# Altium PCB PCB1.PcbDoc
Units mil, origin at the board's own origin, x right, y up, seen from the top; angles counter-clockwise.
Board outline 2560.01 x 1600.01 mil, 4 copper layers (SIG1, GND2, Power3, SIG4), stack 61.58 mil thick; 55 components, 43 nets, 181 pads, 44 vias.
Unrouted connection lines stored in the file: 45.
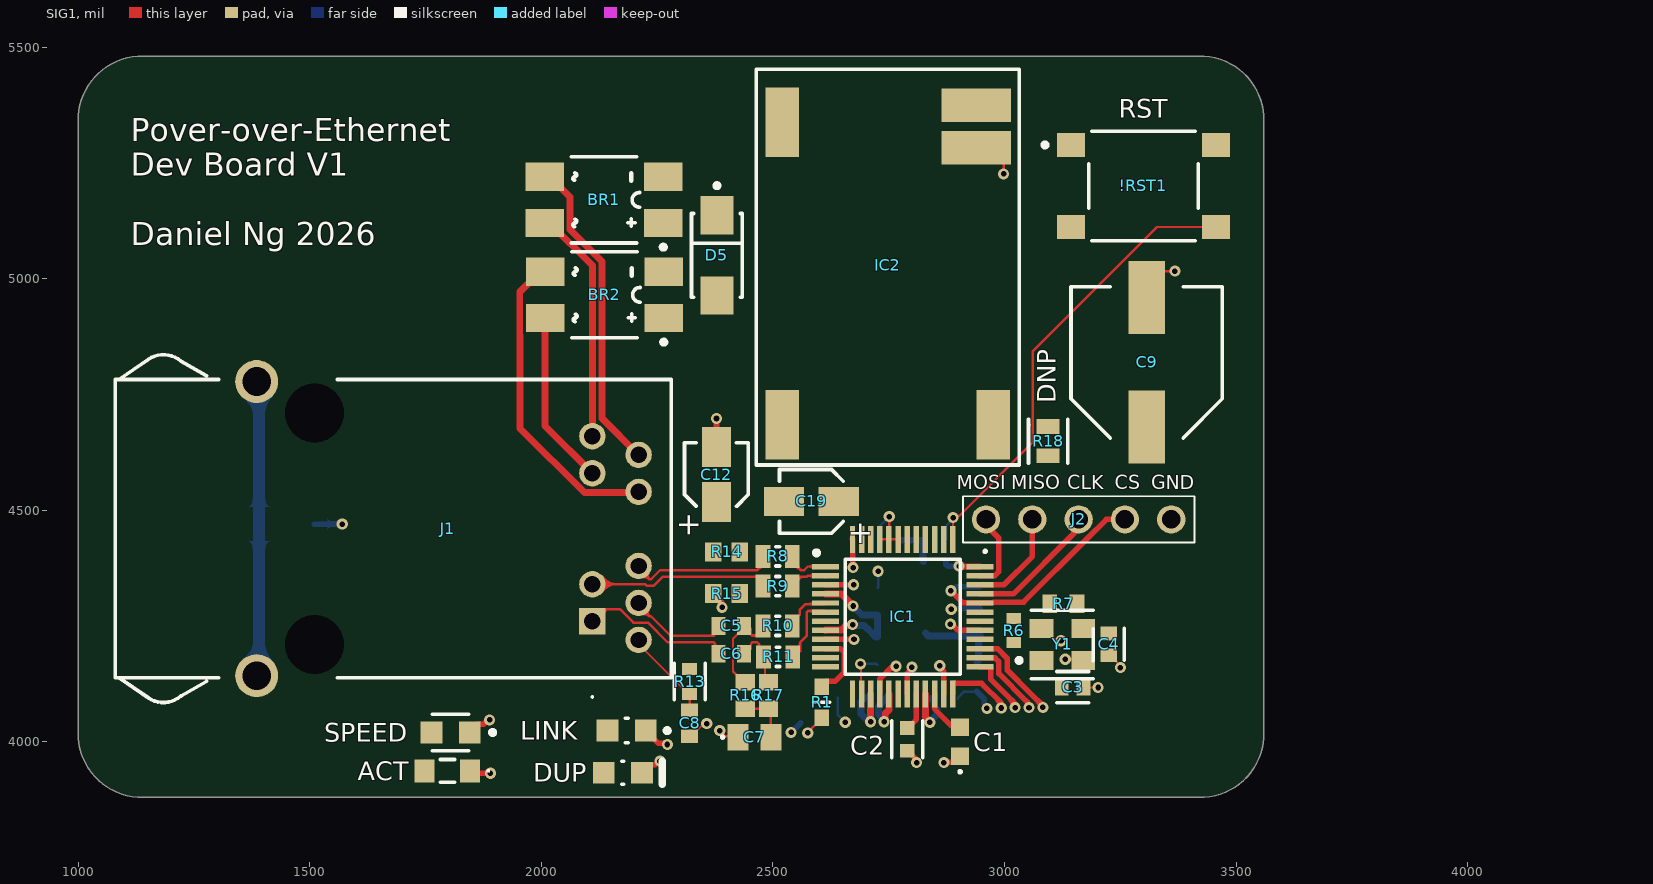
[diagram p0: SIG1 view]
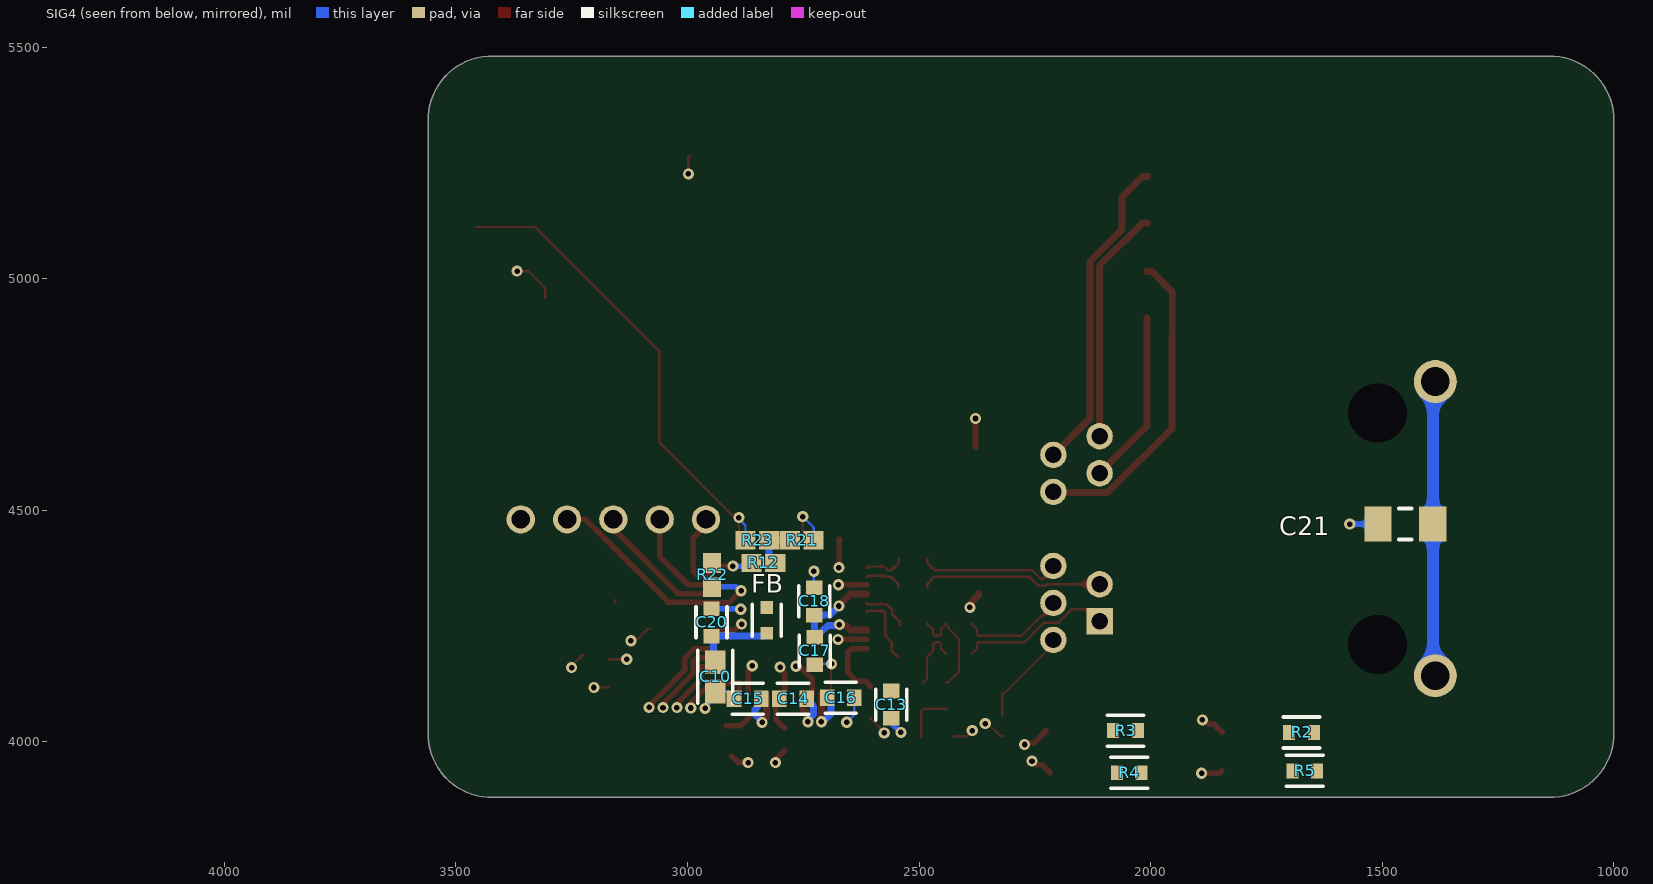
[diagram p1: SIG4 view, seen from below]
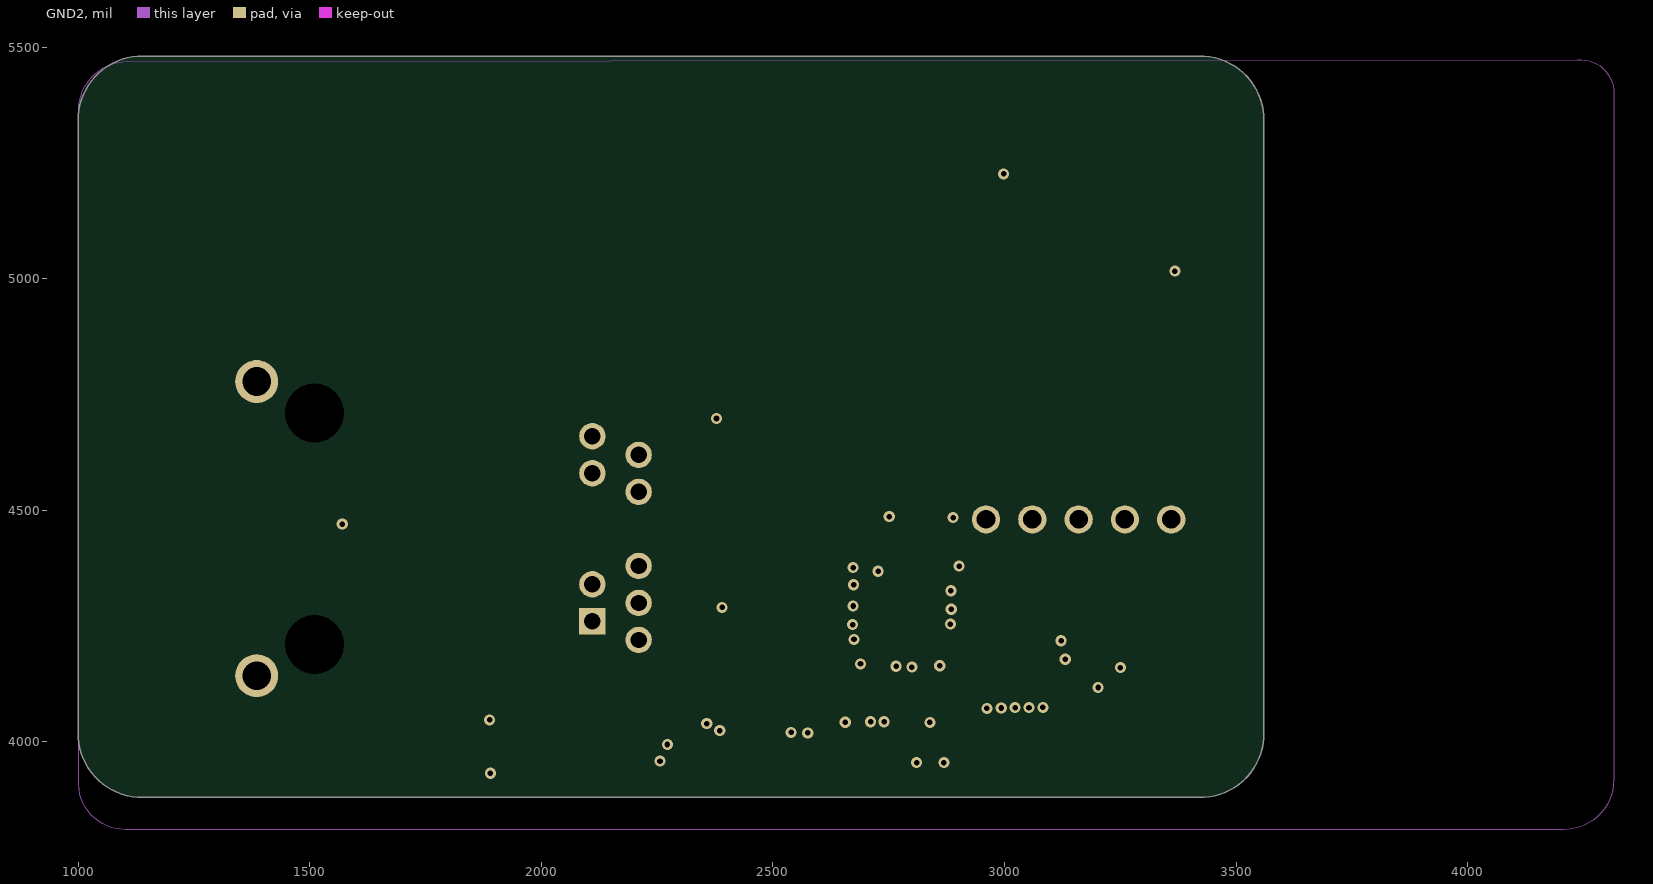
[diagram p2: GND2]
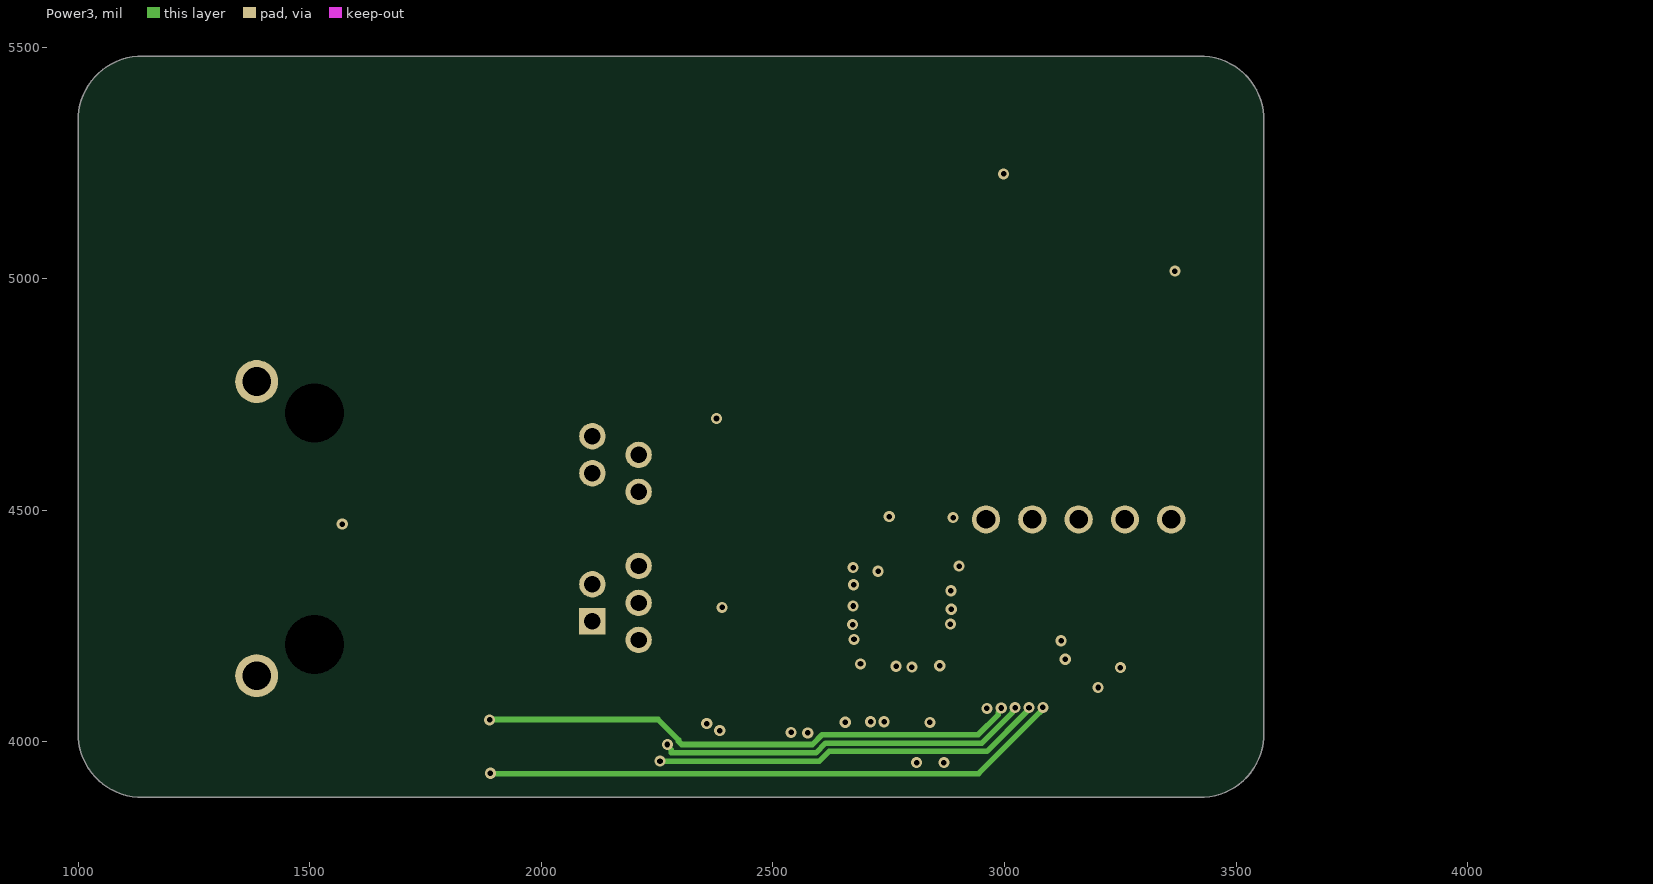
[diagram p3: Power3]
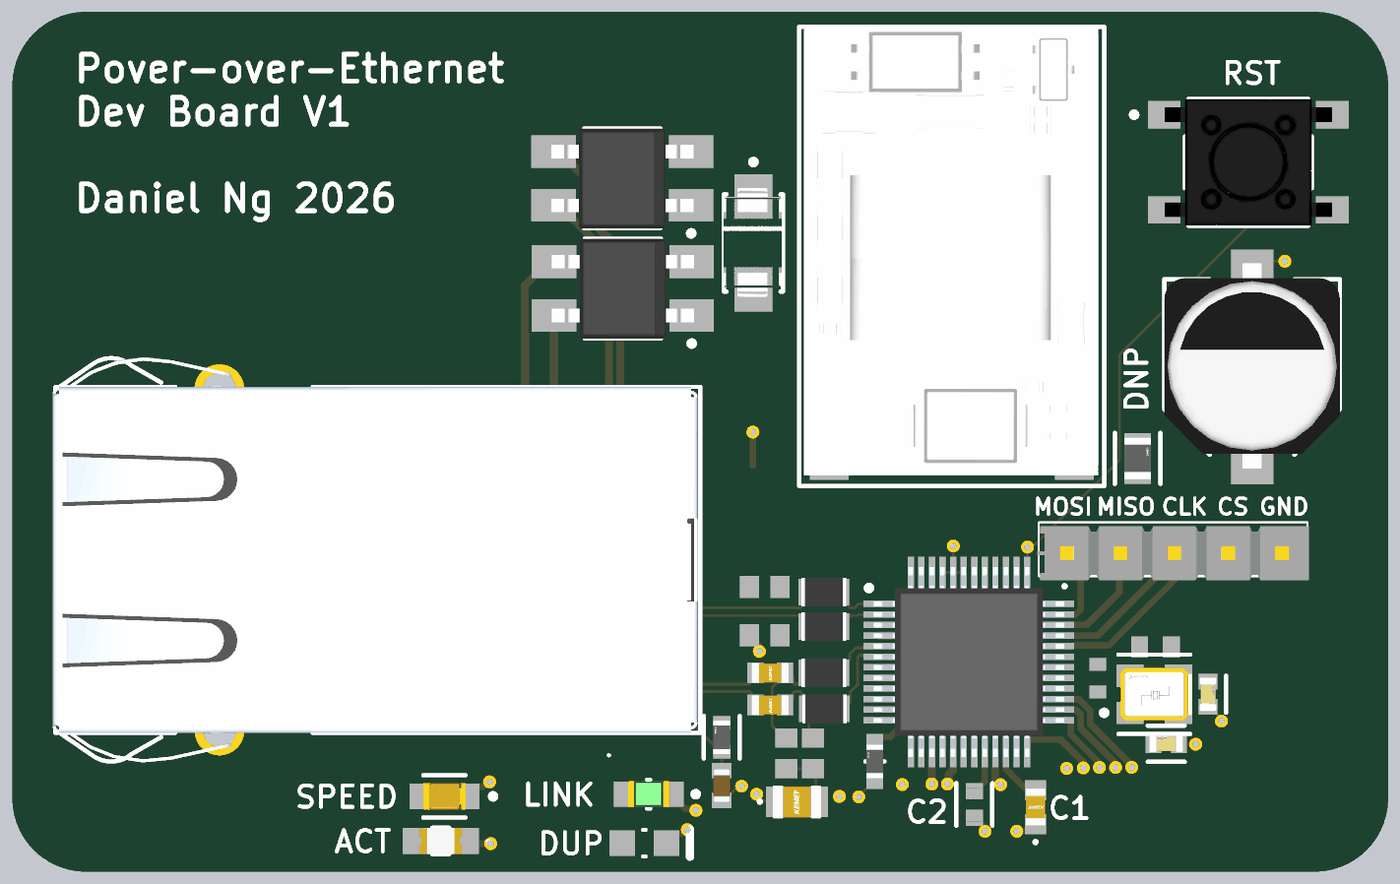
[diagram p4: 3D render of the assembled board from above, using the file's embedded part models]
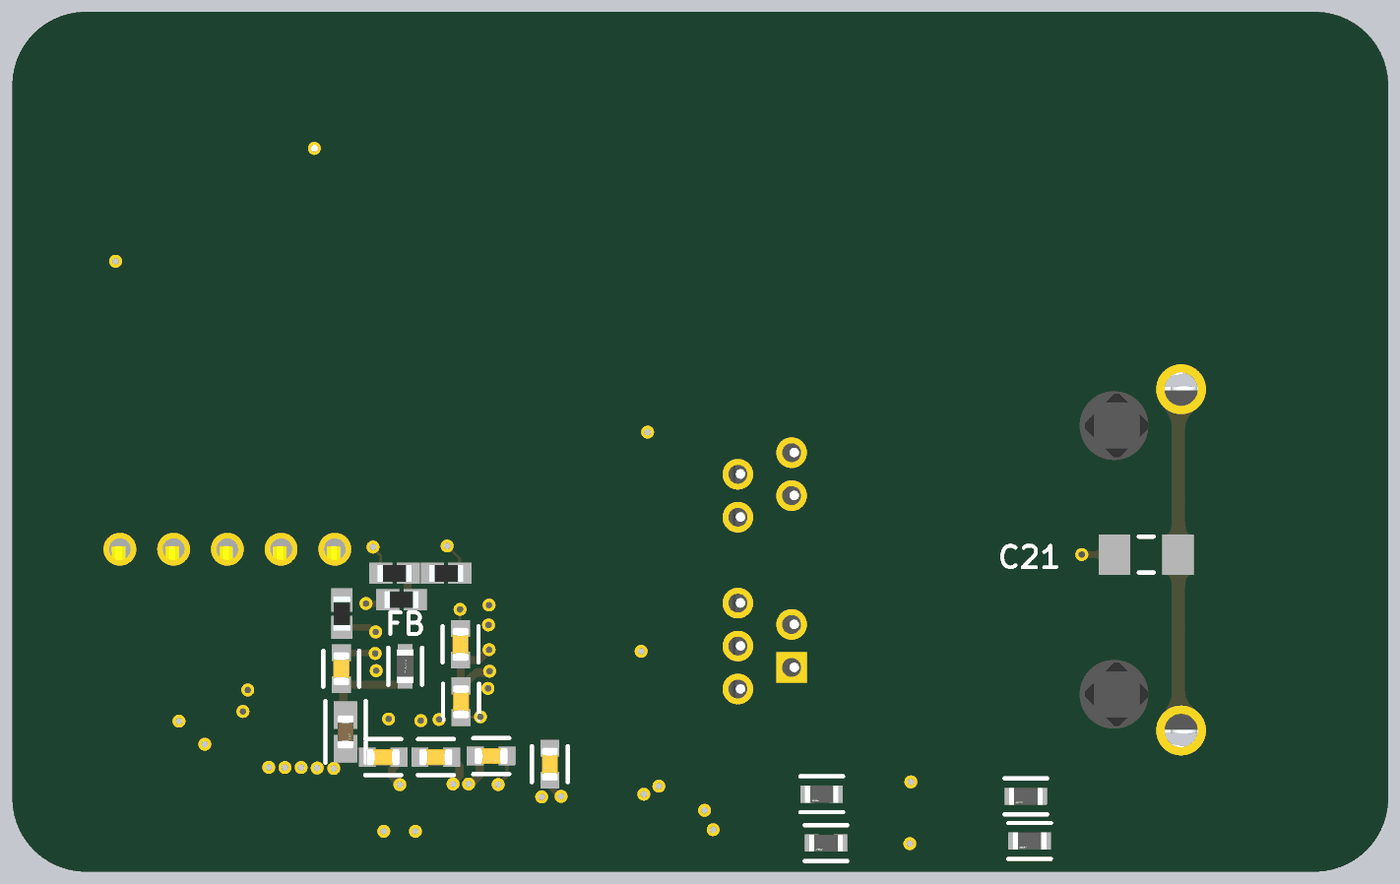
[diagram p5: 3D render of the assembled board from below, using the file's embedded part models]

## Layer stack, top to bottom
Top Solder: solder mask 0.4, Solder Resist, Dk 3.5
SIG1: signal copper 1.38
Dielectric 2: prepreg 3.91, PP-006, Dk 4.1
GND2: signal copper 0.6
Dielectric 1: dielectric 49.8, FR-4, Dk 4.8
Power3: signal copper 0.6
Dielectric 3: prepreg 3.91, PP-006, Dk 4.1
SIG4: signal copper 1.38
Bottom Solder: solder mask 0.4, Solder Resist, Dk 3.5

## Board outline
1000,4020 1000,5340 cw(c1136.67,5343.33) 1140,5480 1860,5480 3420.01,5480 cw(c3423.34,5343.33) 3560.01,5340 3560,4019.99 cw(c3423.33,4016.66) 3420,3879.99 1140,3880 cw(c1136.66,4016.67)

## Design rules (kind name [scope] priority, off if disabled: settings)
Clearance [All] p1: gap=6 ignorepadtopadclearanceinfootprint=FALSE
DiffPairsRouting [InAnyDifferentialPair] p1: maxlimit=9.5 minlimit=8.5 mostfreqgap=9 toplayer_minwidth=4.8 toplayer_maxwidth=5.5 toplayer_prefwidth=5.08 midlayer1_minwidth=4.8 midlayer1_maxwidth=5.5 midlayer1_prefwidth=5.08 midlayer2_minwidth=4.8 midlayer2_maxwidth=5.5 midlayer2_prefwidth=5.08 bottomlayer_minwidth=4.8 bottomlayer_maxwidth=5.5 bottomlayer_prefwidth=5.08 maxuncoupledlength=200
PolygonConnect [All] p1: connectstyle=Relief reliefconductorwidth=10 reliefentries=4 polygonreliefangle="90 Angle" airgapwidth=10
RoutingVias Via_HV [InNet('VA1') OR InNet('VA2') OR InNet('VB1') OR InNet('VB2') OR InNet('HV+') OR InNet('HV-')] p1: holewidth=24 width=50 viastyle="Through Hole" minholewidth=24 minwidth=50 maxholewidth=24 maxwidth=50
RoutingVias Via_Power [InNet('3V3A') OR InNet('3V3D')] p2: holewidth=20 width=44 viastyle="Through Hole" minholewidth=1 minwidth=1 maxholewidth=100 maxwidth=100
RoutingVias Gen_GND [All] p3: holewidth=12 width=24 viastyle="Through Hole" minholewidth=12 minwidth=24 maxholewidth=12 maxwidth=24
RoutingVias Via_Signal [All] p4: holewidth=16 width=36 viastyle="Through Hole" minholewidth=16 minwidth=36 maxholewidth=28 maxwidth=50
SolderMaskExpansion [All] p1: expansion=0 istentingtop=FALSE
SupplyNets "Schematic Supply Nets" [InNet('Chassis')] p1: voltage=0.000
SupplyNets "Schematic Supply Nets_6" [InNet('3V3A')] p2: voltage=0.000
SupplyNets "Schematic Supply Nets_5" [InNet('3V3D')] p3: voltage=0.000
SupplyNets "Schematic Supply Nets_2" [InNet('GND')] p4: voltage=0.000
UnRoutedNet [All] p1: checkbadconnections=TRUE
Width Eth_DP [IsDifferentialPair] p1: maxlimit=12 minlimit=6 preferedwidth=8
Width POE [InNet('VA1') OR InNet('VA2') OR InNet('VB1') OR InNet('VB2') OR InNet('HV+') OR InNet('HV-') OR InNet('Chassis')] p2: maxlimit=80 minlimit=15 preferedwidth=25
Width 3V3 [InNet('3V3A') OR InNet('3V3D')] p3: maxlimit=50 minlimit=10 preferedwidth=22.5
Width Signals [All] p4: maxlimit=12 minlimit=5 preferedwidth=6
28 further rules are at their usual default settings.

## Classes and differential pairs
differential pair RX1: +RX1_P -RX1_N
differential pair TX: +TX_P -TX_N
differential pair RX: +RX_P -RX_N
differential pair TX_RJ: +TX_RJ_P -TX_RJ_N
differential pair RX_RJ: +RX_RJ_P -RX_RJ_N

## Components (designator, comment, footprint, x,y, rotation, side; value= is the part's Value field where it differs from the comment)
!RST1 "PTS645SM43SMTR92LFS" FP-PTS645SM43SMTR92LFS-MFG 3300,5200 r0 top
ACT "Yellow" LTSTC171KSKT 1797,3937 r180 top (schematic designator D4)
BR1 "MB6S" FAIR-MBXS_V 2135,5170 r180 top
BR2 "MB6S" FAIR-MBXS_V 2136,4965 r180 top
C1 "10nF" C0603 2904,4000 r90 top
C2 "4.7uF" FP-CL10-IPC_C 2790,4005 r90 top
C3 "18pF" FP-C0603C-CF-MFG 3147,4118 r0 top value="18 pF"
C4 "18pF" FP-C0603C-CF-MFG 3225,4210 r270 top value="18 pF"
C5 "6.8nF" CAPC1608X87N 2410,4250 r0 top
C6 "6.8nF" CAPC1608X87N 2410,4190 r0 top
C7 "10nF" C0805 2460,4010 r0 top
C8 "100nF" CAPC1608X90N 2320,4040 r90 top
C9 "100uF" EEHZT1E331UP 3307,4819 r90 top
C10 "10uF" FP-GRM188-0_2-IPC_A 2940,4140 r270 bottom
C12 "10uF" WCAP-ASLU_D3H5.5 52378,-45423.05 r270 top
C13 "0.1uF" FP-CC0603-DA-MFG 2560,4080 r270 bottom value="100 nF"
C14 "0.1uF" FP-CC0603-DA-MFG 2772,4093 r0 bottom value="100 nF"
C15 "0.1uF" FP-CC0603-DA-MFG 2870,4093 r0 bottom value="100 nF"
C16 "0.1uF" FP-CC0603-DA-MFG 2669,4095 r180 bottom value="100 nF"
C17 "0.1uF" FP-CC0603-DA-MFG 2725,4196 r270 bottom value="100 nF"
C18 "0.1uF" FP-CC0603-DA-MFG 2726,4303 r90 bottom value="100 nF"
C19 "10uF" WCAP-ASLU_D3H5.5 52582.94,54519 r0 top
C20 "0.1uF" FP-CC0603-DA-MFG 2948.03,4257.66 r90 bottom value="100 nF"
C21 "1nF/2kV" KEMT-1206-2_M 1450,4470 r0 bottom
D5 "SMAJ58A" FP-SMAJ-MFG 2379,5050 r270 top
DUP "Red" LTST-C170KRKT_V 2176,3933 r0 top (schematic designator D3)
FB "MH1608-121Y" FP-MH1608-MFG 2829,4262 r270 bottom
IC1 "W5500" QFP50P900X900X160-48N 2780,4270 r0 top
IC2 "AG9903-MTB" AG9903MTB 2748,5025 r90 top
J1 "0813-1X1T-57-F" 08131X1T57F 2110,4260 r90 top
J2 "SPI Header" TSW-105-XX-YY-S 2960,4480 r0 top
LINK "Green" FP-LTST-C170GKT-MFG 2184,4024 r180 top (schematic designator D2)
R1 "12K4" FP-RC0603-0_55-MFG 2605,4085 r90 top
R2 "1K" FP-RC0603-0_55-IPC_C 1674,4020 r0 bottom
R3 "1K" FP-RC0603-0_55-IPC_C 2054,4024 r0 bottom
R4 "1K" FP-RC0603-0_55-IPC_C 2046,3933 r0 bottom
R5 "1K" FP-RC0603-0_55-IPC_C 1667,3937 r0 bottom
R6 "1M" RESC1608X55X25LL10T15 3020,4240 r90 top
R7 "0R" RESC1608X55X25ML10T15 3127,4298 r180 top
R8 "33R" RESC2013X60X35LL10T20 2510,4400 r0 top
R9 "33R" RESC2013X60X35LL10T20 2510,4336 r0 top
R10 "33R" RESC2013X60X35LL10T20 2510,4250 r0 top
R11 "33R" RESC2013X60X35LL10T20 2511,4183 r0 top
R12 "10kΩ" RESC1608X55N 2836,4386 r180 bottom
R13 "10R" FP-RC0603-0_55-IPC_C 2320,4130 r90 top
R14 "49R9" RESC1608X55X30ML15T15 2400,4410 r180 top
R15 "49R9" RESC1608X55X30ML15T15 2400,4320 r180 top
R16 "49R9" RESC1608X55X30ML15T15 2440,4100 r90 top
R17 "49R9" RESC1608X55X30ML15T15 2490,4100 r90 top
R18 "DNP" FP-AF0805-IPC_C 3094,4649 r90 top
R21 "10kΩ" RESC1608X55N 2753,4435 r0 bottom
R22 "10kΩ" RESC1608X55N 2947,4360 r90 bottom
R23 "10kΩ" RESC1608X55N 2849,4435 r180 bottom
SPEED "Orange" FP-LTST-C170KFKT-MFG 1804,4020 r180 top (schematic designator D1)
Y1 "ABM8-25.000MHZ-B2-T" FP-ABM8-MFG 3125,4210 r0 top

## Footprints (in the part's own frame and the unit in brackets; to place one, negate y for a bottom-side part, rotate by r counter-clockwise, add the part's x,y. Pads: shape width x height; smd on the part's side, far side on the other; paste and mask are expansions set on the pad)
08131X1T57F [mm]
  rect 1.446x1.446 hole 0.89: 1(0,0)
  round 1.446 hole 0.89: 2(2.03,0) 5(8.12,0) 6(10.15,0) 7(-1.02,-2.54) 8(1.01,-2.54) 9(3.04,-2.54) 10(7.1,-2.54) 11(9.13,-2.54)
  round 2.355 hole 1.57: 13(-2.98,18.41) 14(13.15,18.41)
  round 1.625 hole 3.25 unplated: 15(-1.27,15.24) 16(11.43,15.24)
  silkscreen extent -4.45,-4.32 14.62,26.16, body extent -4.49,-4.19 14.66,26.29, height 15.57
AG9903MTB [mm]
  rect 3.81x1.83 smd: 1(-8.655,-5.79) 4(7.935,5.79) 5(-8.655,5.79)
  rect 1.83x3.81 smd: 2(6.535,-4.85) 3(8.875,-4.85)
  silkscreen extent -10.86,-7.79 10.86,7.21, body extent -10.35,-6.93 10.86,6.98, height 12.99
C0603 [mm]
  rect 0.95x1 smd: 1(-0.8,0) 2(0.8,0)
  silkscreen extent -1.7,-0.05 -1.6,0.05, body extent -0.87,-0.48 0.88,0.47, height 0.87
C0805 [mm]
  rect 1.15x1.45 smd: 1(-0.9,0) 2(0.9,0)
  silkscreen extent -1.8,-0.05 -1.7,0.05, body extent -1.15,-0.79 1.15,0.76, height 0.98
CAPC1608X87N [mm]
  rect 0.78x0.98 smd: 1(-0.7,0) 2(0.7,0)
  body extent -0.87,-0.48 0.88,0.47, height 0.87
CAPC1608X90N [mm]
  rect 0.73x0.94 smd: 1(-0.71,0) 2(0.71,0)
  body extent -0.8,-0.4 0.8,0.4, height 0.9
EEHZT1E331UP [mm]
  rect 4x2 smd: 1(-3.55,0) 2(3.55,0)
  silkscreen extent -4.15,-4.15 4.15,4.15, body extent -4.79,-4.15 4.91,4.15, height 10.2
FAIR-MBXS_V [mm] "SMD, 4-Leads, Body 4.725x3.9mm, Pitch 2.54mm"
  rect 2.1x1.55 smd: 1(-3.25,1.27) 2(-3.25,-1.27) 3(3.25,-1.27) 4(3.25,1.27)
  silkscreen extent -3.38,-2.36 1.8,2.72, body extent -3.37,-2.36 3.37,2.36, height 2.9
FP-ABM8-MFG [mm]
  rect 1.3x1.05 smd paste+0 mask+0: 1(-1.15,-0.875) 2(1.15,-0.875) 3(1.15,0.875) 4(-1.15,0.875)
  silkscreen extent -2.5,-1.87 1.7,1.87, body extent -1.9,-1.5 1.9,1.5, height 0.25
FP-AF0805-IPC_C [mil]
  rect 31.82x49.69 smd paste+0 mask+0: 1(-31.57,0) 2(31.57,0)
  silkscreen extent -47,-42 47,42, body extent -39,-25 39,25, height 24
FP-C0603C-CF-MFG [mm]
  rect 0.75x0.9 smd paste+0 mask+0: 1(-0.6,0) 2(0.6,0)
  silkscreen extent -0.87,-0.85 0.88,0.85, body extent -1.2,-0.6 1.2,0.6, height 0.25
FP-CC0603-DA-MFG [mm]
  rect 0.8x0.9 smd paste+0 mask+0: 1(-0.75,0) 2(0.75,0)
  silkscreen extent -0.85,-0.85 0.85,0.85, body extent -0.8,-0.4 0.8,0.4, height 0.9
FP-CL10-IPC_C [mil]
  rect 29.85x31.97 smd paste+0 mask+0: 1(-24.68,0) 2(24.68,0)
  silkscreen extent -40,-33 40,33, body extent -44,-22 44,22, height 10
FP-GRM188-0_2-IPC_A [mil]
  rect 51.38x43.55 smd paste+0 mask+0: 1(-31.52,0) 2(31.52,0)
  silkscreen extent -57,-38 57,38, body extent -31,-16 31,16, height 39
FP-LTST-C170GKT-MFG [mm]
  rect 1.2x1.2 smd paste+0 mask+0: 1(-1.05,0) 2(1.05,0)
  silkscreen extent -2.35,-0.67 0.07,0.67, body extent -1.75,-0.77 1.75,0.77, height 0.25
FP-LTST-C170KFKT-MFG [mm]
  rect 1.2x1.2 smd paste+0 mask+0: 1(-1.05,0) 2(1.05,0)
  silkscreen extent -2.43,-1 1,1, body extent -1.75,-0.77 1.75,0.77, height 0.25
FP-MH1608-MFG [mm]
  rect 0.7x0.7 smd paste+0 mask+0: 1(-0.7,0) 2(0.7,0)
  silkscreen extent -0.87,-0.8 0.87,0.8, body extent -0.8,-0.4 0.8,0.4, height 1
FP-PTS645SM43SMTR92LFS-MFG [mm]
  rect 1.55x1.3 smd paste+0 mask+0: 1(-3.975,2.25) 2(3.975,2.25) 3(-3.975,-2.25) 4(3.975,-2.25)
  silkscreen extent -5.52,-3 3,3, body extent -4.85,-3.1 4.85,3.1, height 0.25
FP-RC0603-0_55-IPC_C [mil]
  rect 25.93x31.97 smd paste+0 mask+0: 1(-26.64,0) 2(26.64,0)
  silkscreen extent -40,-33 40,33, body extent -31,-16 31,16, height 22
FP-RC0603-0_55-MFG [mm]
  rect 0.9x0.8 smd paste+0 mask+0: 1(-0.85,0) 2(0.85,0)
  silkscreen extent 0,-0.45 0,0.45, body extent -1.4,-0.55 1.4,0.55, height 0.25
FP-SMAJ-MFG [mm]
  rect 2.1x1.8 smd paste+0 mask+0: 1(-2.2,0) 2(2.2,0)
  silkscreen extent -3.95,-1.39 2.3,1.39, body extent -3.35,-1.5 3.35,1.5, height 0.25
KEMT-1206-2_M [mm] "SMD, 2-Leads, Body 3.4x1.8mm, IPC Low Density"
  rect 1.5x1.9 smd: 1(-1.5,0) 2(1.5,0)
  silkscreen extent -0.35,-0.85 0.35,0.85, body extent -1.7,-0.9 1.7,0.9, height 0.88
LTST-C170KRKT_V [mm] "SMD, 2-Leads, Body 2x1.25mm"
  rect 1.2x1.2 smd: 1(-1.05,0) 2(1.05,0)
  silkscreen extent -0.05,-0.64 2.16,0.64, body extent -1,-0.63 1,0.63, height 1.2
LTSTC171KSKT [mm]
  rect 1.1x1.25 smd: 1(-1.25,0) 2(1.25,0)
  silkscreen extent -2.3,-0.62 0.4,0.62, body extent -1,-0.63 1,0.63, height 0.8
QFP50P900X900X160-48N [mm]
  rect 1.475x0.3 smd: 1(-4.238,2.75) 2(-4.238,2.25) 3(-4.238,1.75) 4(-4.238,1.25) 5(-4.238,0.75) 6(-4.238,0.25) 7(-4.238,-0.25) 8(-4.238,-0.75) 9(-4.238,-1.25) 10(-4.238,-1.75) 11(-4.238,-2.25) 12(-4.238,-2.75) 25(4.238,-2.75) 26(4.238,-2.25) 27(4.238,-1.75) 28(4.238,-1.25) 29(4.238,-0.75) 30(4.238,-0.25) 31(4.238,0.25) 32(4.238,0.75) 33(4.238,1.25) 34(4.238,1.75) 35(4.238,2.25) 36(4.238,2.75)
  rect 0.3x1.475 smd: 13(-2.75,-4.238) 14(-2.25,-4.238) 15(-1.75,-4.238) 16(-1.25,-4.238) 17(-0.75,-4.238) 18(-0.25,-4.238) 19(0.25,-4.238) 20(0.75,-4.238) 21(1.25,-4.238) 22(1.75,-4.238) 23(2.25,-4.238) 24(2.75,-4.238) 37(2.75,4.238) 38(2.25,4.238) 39(1.75,4.238) 40(1.25,4.238) 41(0.75,4.238) 42(0.25,4.238) 43(-0.25,4.238) 44(-0.75,4.238) 45(-1.25,4.238) 46(-1.75,4.238) 47(-2.25,4.238) 48(-2.75,4.238)
  silkscreen extent -4.85,-3.15 3.15,3.62, body extent -4.5,-4.5 4.5,4.5, height 1.6
RESC1608X55N [mm]
  rect 1.1x1 smd: 1(-0.65,0) 2(0.65,0)
  body extent -0.8,-0.4 0.8,0.4, height 0.55
RESC1608X55X25LL10T15 [mm] "Chip Resistor, 2-Leads, Body 1.70x0.90mm, IPC High Density"
  rect 0.6x0.8 smd: 1(-0.65,0) 2(0.65,0)
  body extent -0.85,-0.45 0.85,0.45, height 0.55
RESC1608X55X25ML10T15 [mm] "Chip Resistor, 2-Leads, Body 1.60x0.80mm, IPC Low Density"
  rect 0.8x1 smd: 1(-0.75,0) 2(0.75,0)
  body extent -0.85,-0.45 0.85,0.45, height 0.55
RESC1608X55X30ML15T15 [mm] "Chip Resistor, 2-Leads, Body 1.60x0.80mm, IPC Low Density"
  rect 0.9x1.05 smd: 1(-0.725,0) 2(0.725,0)
  body extent -0.87,-0.48 0.87,0.48, height 0.55
RESC2013X60X35LL10T20 [mm] "Chip Resistor, 2-Leads, Body 2.1x1.35mm, IPC High Density"
  rect 0.8x1.25 smd: 1(-0.8,0) 2(0.8,0)
  silkscreen extent -0.1,-0.52 0.1,0.52, body extent -1.05,-0.67 1.05,0.68, height 0.6
TSW-105-XX-YY-S [mm]
  round 1.55 hole 1.02: 1(0,0) 2(2.54,0) 3(5.08,0) 4(7.62,0) 5(10.16,0)
  silkscreen extent -1.27,-1.8 11.43,1.27, body extent -1.34,-1.46 11.49,1.08, height 8.51
WCAP-ASLU_D3H5.5 [mm] "Aluminum Electrolytic Capacitors, body diameter 3mm"
  rect 2.2x1.6 smd: 1(-1268.5,-1270) 2(-1271.5,-1270)
  silkscreen extent -1271.75,-1271.75 -1268.25,-1268.25, body extent -1271.9,-1271.65 -1268.1,-1268.35, height 5.5

## Part data
!RST1: library part CMP-2000-05160-2, "SWITCH TACTILE SPST-NO 0.05A 12V", Case/Package=SMD/SMT, Color=Black, Contact Resistance=100mR, Current Rating=50mA, Max Operating Temperature=60°C, Max Voltage Rating (DC)=12V, Min Operating Temperature=-20°C, Operating Force=160gf, Package Quantity=1, Actuator Length=0.85mm, Actuator Material=Nylon, Actuator Type=Standard, Contact Material=Silver, Contact Plating=Silver, Depth=9mm, Illumination Type=Non-Illuminated, Lead Free="Lead Free", Length=6mm, Max Current Rating=50mA, Mechanical Life=100000Cycles, Mount="Surface Mount", Orientation=Straight, Packaging="Tape and Reel", REACH SVHC="No SVHC", Switch Function=Off-Mom, Termination="Gull Wing", Throw Configuration=SPST, Voltage Rating (DC)=12V
ACT: library part LTST-C171KSKT, "LED", Manufacturer_Name=Lite-On, Mouser Part Number=859-LTST-C171KSKT, Arrow Part Number=LTST-C171KSKT, Arrow Price/Stock=https://www.arrow.com/en/products/ltst-c171kskt/lite-on-technology.html?utm_currency=USD&region=nac, Datasheet Link=https://optoelectronics.liteon.com/upload/download/DS22-2000-110/LTST-C171KSKT.pdf, Height=0.9mm, Manufacturer_Part_Number=LTST-C171KSKT, Mouser Price/Stock=https://www.mouser.co.uk/ProductDetail/LITEON/LTST-C171KSKT?qs=llMtm9xcdM0CwR1bByTaUQ%3D%3D
BR1 BR2: library part CMP-2000-06669-1, "Bridge Rectifier, 0.5 A, -55 to 150 degC, 4-Pin SMD, RoHS, Tape and Reel", Manufacturer=FairchildSemiconductor, Operating Temperature=-55to150°C, Package=4SOICN, Package Description="4-Pin Surface Mount Device, Body 4.725 x 3.9 mm, Pitch 2.54 mm", Package Reference=MBXS, Peak Average Forward Current=0.5@Ta=50CA, Peak Forward Voltage=1V, Peak Reverse Current=5uA, Peak Reverse Repetitive Voltage=600V, Bridge Type=SinglePhase, Category=BridgeRectifier, Configuration=Single, Datasheet URL=http://www.fairchildsemi.com/datasheets/MB/MB1S.pdf, Datasheet Version="Rev. 1.2.3, 04/2014", Manufacturer URL=https://www.fairchildsemi.com/, Mounting=SurfaceMount, Mounting Technology=SurfaceMount, Packaging=Tape&Reel, Rad Hard=No
C1: library part C0603C103K4RECTU, "Capacitor", Manufacturer_Name="Yageo Group", Mouser Part Number=80-C0603C103K4RECTU, Arrow Part Number=C0603C103K4RECTU, Arrow Price/Stock=https://www.arrow.com/en/products/c0603c103k4rectu/kemet-corporation?region=nac, Datasheet Link=https://content.kemet.com/datasheets/KEM_C1090_X7R_ESD.pdf, Height=0.87mm, Manufacturer_Part_Number=C0603C103K4RECTU, Mouser Price/Stock=https://www.mouser.co.uk/ProductDetail/KEMET/C0603C103K4RECTU?qs=55YtniHzbhDzGaFFpCm8vg%3D%3D
C2: library part CMP-13271-003017-1, "Cap Ceramic 4.7uF 10V X5R ±10% Pad SMD 0603 +85°C T/R", Case Code (Imperial)=0603, Case Code (Metric)=1608, Dielectric=X5R, Max Operating Temperature=85°C, Min Operating Temperature=-55°C, Package Quantity=1, Tolerance=10%, Voltage Rating=10V, Capacitance=4.7uF, Case/Package=0603, Contact Plating=Tin, Depth=0.8mm, Height=0.8mm, Length=1.6mm, Mount="Surface Mount", Packaging="Tape and Reel", Radiation Hardening=No, Thickness=0.035inch, Width=0.031inch
C3 C4: library part CMP-2006-03702-3, "CAP CER 18PF 50V C0G/NP0 0603", Capacitance="18 pF", Manufacturer=KEMET, Manufacturer Part Number=C0603C180J5GACTU, Package=C0603C-CF, Temperature="-55°C to +125°C", Temperature Characteristic=C0G, Temperature Coefficient=30ppm/°C, Temperature Range High=+125°C, Temperature Range Low=-55°C, Tolerance=0.05, Voltage Rating="50 V", Automotive=Yes, Automotive Grade="Grade 1", Category=Cap, ComponentLink2Description=Datasheet, ComponentLink2URL=https://api.kemet.com/component-edge/download/datasheet/C0603C100J5GACAUTO.pdf, Device Class L1="Passive Components", Device Class L2=Capacitors, Device Class L3="Ceramic Capacitors", Digikey Description="CAP CER 18PF 50V C0G/NP0 0603", Height=0.87mm, Lead Free=Yes, Material=Ceramic, Mouser Description="Capacitor; Ceramic; Cap; 18.0pF; Tol 5%; SMT; Vol-Rtg 50V; C0G; Tape and Reel", Octopart=https://octopart.com/c0603c180j5gactu-kemet-97992, RoHS=TRUE
C5 C6: library part C0603C682K4REC7411, "Capacitor", Manufacturer_Name="Yageo Group", Datasheet Link=https://www.yageogroup.com/content/datasheet/asset/file/KEM_C1090_X7R_ESD, Height=0.87mm, Manufacturer_Part_Number=C0603C682K4REC7411
C7: library part C0805C103K5RECAUTO, "Capacitor", Manufacturer_Name="Yageo Group", Datasheet Link=https://www.yageogroup.com/content/datasheet/asset/file/KEM_C1090_X7R_ESD, Height=1.1mm, Manufacturer_Part_Number=C0805C103K5RECAUTO
C8: library part CL10E104KC8VPNC, "Capacitor", Manufacturer_Name=SAMSUNG, Mouser Part Number=187-CL10E104KC8VPNC, Arrow Part Number=CL10E104KC8VPNC, Arrow Price/Stock=https://www.arrow.com/en/products/cl10e104kc8vpnc/samsung-electro-mechanics?utm_currency=USD&region=nac, Datasheet Link=https://product.samsungsem.com/mlcc/CL10E104KC8VPN.do, Height=0.9mm, Manufacturer_Part_Number=CL10E104KC8VPNC, Mouser Price/Stock=https://www.mouser.co.uk/ProductDetail/Samsung-Electro-Mechanics/CL10E104KC8VPNC?qs=Imq1NPwxi75HCIKjcbKf0w%3D%3D
C9: library part EEE-FP1V101AP, "Capacitor Polarised", Manufacturer_Name=Panasonic, Mouser Part Number=667-EEE-FP1V101AP, Arrow Part Number=EEE-FP1V101AP, Arrow Price/Stock=https://www.arrow.com/en/products/eee-fp1v101ap/panasonic?region=europe, Datasheet Link=http://industrial.panasonic.com/cdbs/www-data/pdf/RDE0000/ABA0000C1184.pdf, Height=10.8mm, Manufacturer_Part_Number=EEE-FP1V101AP, Mouser Price/Stock=https://www.mouser.co.uk/ProductDetail/Panasonic/EEE-FP1V101AP?qs=d1CqaRUMZD%252BedtcvZLkG3A%3D%3D
C10: library part CMP-06035-045268-1, "Chip Multilayer Ceramic Capacitors for General Purpose, 0603, 10uF, X5R, 15%, 10%, 25V", Case/Package=0603
C12 C19: library part CMP-207834-000002-3, "Cap WCAP-ASLU Aluminum Electrolytic 10uF", Capacitance=10µF, Case/Package=Radial, Leakage Current=3µA, Max Operating Temperature=85°C, Min Operating Temperature=-40°C, Ripple Current=20mA, Tolerance=20%, Voltage Rating=16V, Diameter=3mm, Dissipation Factor=18%, Height=5.5mm, Length=5.5mm, Life (Hours)=2000hours, RoHS=Compliant, Voltage Rating (DC)=16V, Width=3.3mm
C13 C14 C15 C16 C17 C18 C20: library part CMP-2100-03601-2, "CAP CER 0.1UF 50V X7R 0603", Capacitance="100 nF", Manufacturer=YAGEO, Manufacturer Part Number=CC0603KRX7R9BB104, Package=CC0603-DA, Temperature="-55°C to +125°C", Temperature Characteristic=X7R, Temperature Coefficient=15%, Temperature Range High=+125°C, Temperature Range Low=-55°C, Tolerance=0.1, Voltage="50 V", Automotive=No, Category=Cap, ComponentLink2Description=Datasheet, ComponentLink2URL=http://www.yageo.com/documents/recent/UPY-GPHC_X7R_6.3V-to-50V_18.pdf, Device Class L1="Passive Components", Device Class L2=Capacitors, Device Class L3="Ceramic Capacitors", Digikey Description="CAP CER 0.1UF 50V X7R 0603", Footprint Url=http://www.yageo.com/exep/pages/download/literatures/UPY-C_GEN_24.pdf, Height=0.9mm, Lead Free=Yes, Material=Ceramic, Mouser Description="Multilayer Ceramic Capacitor, CC Series, 0.1 - F, - 10%, X7R, 50 V, 0603 [1608 Metric]", Octopart=https://octopart.com/cc0603krx7r9bb104-yageo-42244635, RoHS=TRUE, Voltage Rating="50 V"
C21: library part CMP-1037-04202-2, "CAP, Ceramic, 0.1 uF, +/- 10%, 50 V, -55 to 125 degC, 1206 (3216 Metric), RoHS, Tape and Reel", Capacitance=0.1µF, Capacitance Tolerance=±10%, Capacitor Case Style=1206[3216Metric], Dielectric Characteristic=X7R, Manufacturer=Kemet, Operating Temperature Max=125degC, Operating Temperature Min=-55degC, Package Description="2-Leads SMD, Body 3.2 x 1.6 mm", Package Reference=1206-2, Voltage Rating=50V, Datasheet URL=https://datasheet.ciiva.com/6125/1725438-6125494.pdf, Datasheet Version=Jul-13, Manufacturer URL=http://www.kemet.com/, Packaging=Tape&Reel, Product Range=KEMET-CSeries, SVHC=ToBeAdvised
D5: library part CMP-08607-000100-1, "TVS DIODE 58V 93.6V DO214AC", Breakdown Voltage=64.4V, Clamping Voltage=93.6V, Current=43A, Leakage Current=1uA, Max Breakdown Voltage=71.2V, Max Operating Temperature=150°C, Max Power Dissipation=3.3W, Max Surge Current=4.3A, Min Operating Temperature=-65°C, Operating Supply Voltage=58V, Package Quantity=5000, Peak Pulse Power=400W, Power Line Protection=No, Test Current=1mA, Composition=Zener, Direction=Unidirectional, Element Configuration=Single, Height=2.087mm, Lead Free="Lead Free", Length=4.5mm, Max Reverse Leakage Current=1uA, Min Breakdown Voltage=64.4V, Mount="Surface Mount", Number of Channels=1, Number of Elements=1, Number of Pins=2, Number of Unidirectional Channels=1, Packaging="Tape and Reel", Peak Pulse Current=4.3A, Polarity=Unidirectional, Power Dissipation=400W, REACH SVHC="No SVHC", Reverse Breakdown Voltage=64.4V, Reverse Standoff Voltage=58V, Termination=SMD/SMT, Voltage=58V, Voltage Rating (DC)=58V, Width=2.79mm
DUP: library part CMP-2000-07593-1, "LED Red, 75 mW, 54 mcd, -55 to 85 degC, 2-Pin SMD, RoHS, Tape and Reel", Case Code (Imperial)=0805, Case Code (Metric)=2012, Forward Current=30mA, Forward Voltage=2V, Lens Colour=Colorless, Manufacturer=Lite-On, Max Operating Temperature=85degC, Min Operating Temperature=-55degC, Package Description="2-Pin Surface Mount Device, Body 2 x 1.25 mm", Package Quantity=1, Package Reference=C170KRKT, Power Dissipation=75mW, Test Current=20mA, Case\/Package=0805, Colour=Red, Datasheet URL=http://optoelectronics.liteon.com/upload/download/DS-22-99-0150/LTST-C170KRKT.pdf, Datasheet Version="Rev. D, 11/2014", Depth=1.6mm, Dominant Wavelength=631nm, Height=1.1mm, Illumination Colour=Red, Lead Free=LeadFree, Length=3.2mm, Lens Style=Rectangular, Lens Transparency=Clear, Luminous Intensity=54mcd, Manufacturer URL=http://www.us.liteon.com/, Mount=SurfaceMount, Mounting Technology=SurfaceMount, Number of Elements=1, Number of LEDs=1, Number of Pins=2, Packaging=TapeandReel, Power Rating=75mW, Radiation Hardening=No, RoHSCompliant=True, Viewing Angle=130degrees, Wavelength=639nm, Width=1.25mm
FB: library part CMP-00059-02110036-1, "MH1608-121Y Ferrite Beads High Current Chip 120Ohm 25% 100MHz 2A 100mOhm DCR 0603 T/R", Case Code (Imperial)=0603, Case Code (Metric)=1608, Current Rating=2A, DC Resistance (DCR)=100mΩ, Max Operating Temperature=125°C, Min Operating Temperature=-55°C, Test Frequency=100MHz, Tolerance=25%, Case/Package=0603, Core Material=Ferrite, Depth=1mm, Height=990.6µm, Impedance=120Ω, Length=1.6002mm, Max Current Rating=2A, Max DC Current=2A, Mount="Surface Mount", NexarPartId=2110036, Number of Lines=1, Packaging="Tape & Reel (TR)", REACH SVHC="No SVHC", Resistance=100mΩ, RMS Current (Irms)=2A, RoHS=Compliant, Schedule B="8504500000, 8504500000", Series Resistance=100mΩ, Termination=SMD/SMT, Width=787.4µm
IC1: "Integrated Circuit", Manufacturer_Name="Wiznet Technology", Arrow Part Number=W5500, Arrow Price/Stock=https://www.arrow.com/en/products/w5500/wiznet?utm_currency=USD&region=nac, Datasheet Link=https://docs.wiznet.io/img/products/w5500/W5500_ds_v110e.pdf, Height=1.6mm, Manufacturer_Part_Number=W5500
IC2: "Integrated Circuit", Manufacturer_Name=Silvertel, Mouser Part Number=480-AG9903-MTB, Datasheet Link=https://silvertel.com/images/datasheets/Ag9900M-datasheet-ultra-miniature-isolated-Power-over-Ethernet-POE-module.pdf, Height=13.9mm, Manufacturer_Part_Number=AG9903-MTB, Mouser Price/Stock=https://www.mouser.co.uk/ProductDetail/Silvertel/AG9903-MTB?qs=vvQtp7zwQdMW5QJXChJipQ%3D%3D
J1: "Connector", Manufacturer_Name=BelFuse, Mouser Part Number=530-0813-1X1T-57-F, Arrow Part Number=0813-1X1T-57-F, Arrow Price/Stock=https://www.arrow.com/en/products/0813-1x1t-57-f/bel-group, Datasheet Link=https://www.belfuse.com/resources/drawings/magneticsolutions/dr-mag-0813-1x1t-57-f.pdf, Height=15.58mm, Manufacturer_Part_Number=0813-1X1T-57-F
J2: library part TSW-105-07-F-S, "Connector", Manufacturer_Name=SAMTEC, Mouser Part Number=200-TSW10507FS, Arrow Part Number=TSW-105-07-F-S, Arrow Price/Stock=https://www.arrow.com/en/products/tsw-105-07-f-s/samtec?region=europe, Datasheet Link=http://suddendocs.samtec.com/prints/tsw-xxx-xx-xxx-x-xx-xxx-mkt.pdf, Manufacturer_Part_Number=TSW-105-07-F-S, Mouser Price/Stock=https://www.mouser.co.uk/ProductDetail/Samtec/TSW-105-07-F-S?qs=rU5fayqh%252BE0rjSr2FD4jkw%3D%3D
LINK: library part CMP-1674-00002-6, "LED GREEN CLEAR SMD", Case Code (Imperial)=0805, Case Code (Metric)=2012, Forward Current=30mA, Forward Voltage=2.1V, Lens Color=Colorless, Max Operating Temperature=85°C, Min Operating Temperature=-55°C, Package Quantity=1, Power Dissipation=100mW, Reverse Voltage=5V, Test Current=10mA, Case/Package=0805, Color=Green, Depth=1.25mm, Dominant Wavelength=569nm, Height=1.1mm, Illumination Color=Green, Lead Free="Lead Free", Length=2mm, Lens Style=Diffused, Lens Transparency=Clear, Luminous Intensity=6mcd, Mount="Surface Mount", Number of Elements=1, Number of LEDs=1, Number of Pins=2, Packaging="Tape and Reel", Power Rating=100mW, Radiation Hardening=No, Viewing Angle=130°, Voltage=5V, Wavelength=565nm, Width=1.25mm
R1: library part CMP-03412-037814-1, "RES SMD 12.4K OHM 1% 1/10W 0603", Case Code (Imperial)=0603, Case Code (Metric)=1608, Max Operating Temperature=155°C, Max Power Dissipation=100mW, Min Operating Temperature=-55°C, Package Quantity=1, Resistance=12.4kR, Resistor Type="Thick Film", Temperature Coefficient=100ppm/°C, Tolerance=1%, Voltage Rating=50V, Working Voltage=75V, Case/Package=0603, Construction=Rectangular, Depth=0.8mm, Features="Moisture Resistant", Height=0.022inch, Lead Free="Lead Free", Length=0.063inch, Military Standard=Not, Number of Terminations=2, Packaging="Tape and Reel", Power Rating=100mW, RoHS Compliant=Yes, Series=RC, Technology="THICK FILM", Termination=SMD/SMT, Voltage Rating (DC)=50V, Width=0.031inch
R2 R3 R4 R5: library part CMP-1659-00009-5, "RES 1K OHM 1% 1/10W 0603", Case Code (Imperial)=0603, Case Code (Metric)=1608, Max Operating Temperature=155°C, Max Power Dissipation=100mW, Min Operating Temperature=-55°C, Resistance=1kR, Resistance Tolerance=1%, Resistor Type="Thick Film", Temperature Coefficient=100ppm/°C, Voltage Rating=50V, Case/Package=0603, Construction=Rectangular, Contact Plating=Tin, Depth=0.8mm, Features="Moisture Resistant", Height=0.45mm, Lead Free="Lead Free", Length=1.6mm, Military Standard=Not, Number of Terminations=2, Packaging="Tape and Reel", Power Rating=100mW, Radiation Hardening=No, REACH SVHC="No SVHC", RoHS Compliant=Yes, Series=RC, Size Code=0603, Technology="THICK FILM", Termination=SMD/SMT, Tolerance=1%
R6: library part CMP-1659-00056-1, "Chip Resistor, 1 MOhm, +/- 1%, 100 mW, -55 to 155 degC, 0603 (1608 Metric), RoHS, Tape and Reel", Capacitance="1 mF", Case\Package=Radial, Max Operating Temperature="85 degC", Min Operating Temperature="-40 degC", Package Quantity=200, Tolerance=20%, Voltage Rating="25 V", ComponentLink1Description="Manufacturer URL", ComponentLink1URL=http://www.yageo.com/, ComponentLink2Description=Datasheet, ComponentLink2URL=http://www.yageo.com/documents/recent/PYu-RC_Group_51_RoHS_L_04.pdf, DatasheetVersion="Rev. 4, 02/2016", Diameter="10 mm", Height="20 mm", Lead Pitch="5 mm", Length="20 mm", Mount="Through Hole", PackageDescription="2-Pin Surface Mount Device, Body 1.6 x 0.8 mm", PackageReference=0603, Packaging=Bulk, Radiation Hardening=No, REACH SVHC="No SVHC", RoHSCompliant=true, Voltage Rating (DC)="25 V", Width="0 inch"
R7: library part CMP-2100-03667-1, "Chip Resistor, 0 Ohm, +/- 5%, 0.1 W, -55 to 155 degC, 0603 (1608 Metric), RoHS, Tape and Reel", Case Code (Imperial)=0603, Case Code (Metric)=1608, Manufacturer=Yageo, Max Operating Temperature=155degC, Min Operating Temperature=-55degC, Package Description="2-Pin Surface Mount Device, Body 1.6 x 0.8 mm", Package Quantity=5000, Power Rating=100mW, Resistance=0mOhm, Temperature Coefficient=200ppm/degreesC, Tolerance=5%, Voltage Rating=50V, Case/Package=0603, Composition=ThickFilm, Contact Plating=Tin, Datasheet URL=http://www.yageo.com/NewPortal/yageodocoutput?fileName=/pdf/R-Chip/PYu-RC_Group_51_RoHS_L_5.pdf, Datasheet Version="Rev. 5, 10/2016", Depth=0.8mm, Height=0.45mm, Lead Free=LeadFree, Length=1.6mm, Manufacturer URL=http://www.yageo.com/, Military Standard=Not, Number of Pins=2, Package Reference=0603, Packaging=TapeandReel, Radiation Hardening=No, REACH SVHC=NoSVHC, RoHSCompliant=true, Termination=SMD/SMT, Voltage Rating (DC)=50V, Width=0.8mm
R8 R9 R10 R11: library part CMP-1659-00015-4, "Chip Resistor, 33 Ohm, +/- 1%, 0.125 W, -55 to 155 degC, 0805 (2012 Metric), RoHS, Tape and Reel", Manufacturer=Yageo, Max Operating Temperature="155 degC", Min Operating Temperature="-55 degC", Package Quantity=5000, Voltage Rating="150 V", ComponentLink1Description="Manufacturer URL", ComponentLink1URL=http://www.yageo.com/, ComponentLink2Description=Datasheet, ComponentLink2URL=http://www.yageo.com/documents/recent/PYu-RC_Group_51_RoHS_L_04.pdf, DatasheetVersion="Rev. 4, 02/2016", Height="0.5 mm", Length="2 mm", Mount="Surface Mount", Mounting Technology="Surface Mount", PackageDescription="2-Pin Surface Mounted Device, Body 2 x 1.25 mm", PackageReference=0805, Packaging="Tape and Reel", Pins=2, REACH SVHC="No SVHC", RoHSCompliant=true
R12 R21 R22 R23: library part RC0603FR0710KL, "Resistor", Manufacturer_Name=KEMET, Arrow Part Number=RC0603FR0710KL, Arrow Price/Stock=https://www.arrow.com/en/products/rc0603fr-0710kl/yageo, Datasheet Link=http://www.yageo.com/documents/recent/PYu-RC0603_51_RoHS_L_v5.pdf, Height=0.55mm, Manufacturer_Part_Number=RC0603FR0710KL
R13: library part CMP-2100-03664-2, "RES 10K OHM 1% 1/10W 0603", Case Code (Imperial)=0603, Case Code (Metric)=1608, Max Operating Temperature=155°C, Max Power Dissipation=100mW, Min Operating Temperature=-55°C, Resistance=10kR, Resistance Tolerance=1%, Resistor Type="Thick Film", Temperature Coefficient=100ppm/°C, Voltage Rating=75V, Voltage Rating (DC)=50V, Case/Package=0603, Construction=Rectangular, Depth=0.8mm, Features="Moisture Resistant", Height=0.45mm, Lead Free="Lead Free", Lead Pitch=0.3mm, Length=1.6mm, Military Standard=Not, Number of Pins=2, Number of Terminations=2, Packaging="Tape and Reel", Power Rating=100mW, RoHS Compliant=Yes, Series=RC, Size Code=0603, Termination=SMD/SMT, Tolerance=1%, Weight=7.1E-05oz, Width=0.8mm
R14 R15 R16 R17: library part CMP-2000-00538-1, Manufacturer=Panasonic, Part Number=ERJ-3EKF49R9V
R18: library part CMP-03412-045127-1, "Anti-Sulfurated Chip Resistor Automotive Grade 130Ω 1% 0.125W ±100ppm/°C 0805", Case/Package=0805, Max Operating Temperature=155°C, Max Power Dissipation=125mW, Min Operating Temperature=-55°C, Resistance=130R, Resistor Type="Thick Film", Temperature Coefficient=100ppm/°C, Tolerance=1%, Features="Moisture Resistant", Height=0.024inch, Length=0.079inch, Number of Terminations=2, Packaging="Tape and Reel", RoHS Compliant=Yes, Series=AF, Width=0.049inch
SPEED: library part CMP-22017-000036-1, "LED ORANGE CLEAR SMD", Case Code (Imperial)=0805, Case Code (Metric)=2012, Forward Current=30mA, Forward Voltage=2V, Lens Color=Colorless, Max Operating Temperature=85°C, Min Operating Temperature=-55°C, Package Quantity=1, Power Dissipation=75mW, Reverse Voltage=5V, Test Current=20mA, Case/Package=0805, Color=Orange, Depth=1.6mm, Dominant Wavelength=605nm, Height=1.1mm, Illumination Color=Orange, Lead Free="Lead Free", Length=3.2mm, Lens Style=Diffused, Lens Transparency=Clear, Luminous Intensity=60mcd, Mount="Surface Mount", Number of Elements=1, Number of LEDs=1, Number of Pins=2, Packaging="Tape and Reel", Power Rating=75mW, Radiation Hardening=No, Viewing Angle=130°, Wavelength=611nm, Width=1.25mm
Y1: library part CMP-27762-013668-1, "Crystal 25MHz ±20ppm 18pF SMD-4 3.2mm x 2.5mm", Case/Package=CSMD, ESR (Equivalent Series Resistance)=50R, Frequency=25MHz, Frequency Stability=50ppm, Frequency Tolerance=20ppm, Load Capacitance=18pF, Max Operating Temperature=70°C, Min Operating Temperature=-20°C, Operating Frequency="25 MHz", Package Quantity=1000, Resistor Type=Ceramic, Depth=2.5mm, Height=0.031inch, Lead Free="Lead Free", Length=3.2mm, Mount="Surface Mount", Number of Pins=4, Packaging="Tape and Reel", Radiation Hardening=No, REACH SVHC="No SVHC", Series=ABM8, Series Resistance=50R, Termination=SMD/SMT, Tolerance=20ppm, Width=0.098inch

## Via types
v1: diameter 24, hole 12, SIG1 to SIG4, 44 vias

## Nets (pads, with @x,y where several pads share a name; then routed paths per layer and width w, separated by ;. In a path a pad name is that pad's centre, name@x,y a point inside that pad or via, vN(x,y) a via of type N, cw(c..) or ccw(c..) an arc to the next point about the centre after c; other vN are vias at no path point)
3V3A: C12.1 C13.1 C14.1 C15.1 C16.1 C17.1 C18.1 FB.1 IC1.4 IC1.8 IC1.11 IC1.15 IC1.17 IC1.21 R13.2 R14.2 R15.2 | length 726.9
  SIG1 w15: R15.2 2371.46,4317.05 2387.51,4300.99 2387.51,4292.49 v1(2390,4290) ; IC1.8 2613.43,4240.75 2647.78,4240.75 2657.54,4250.51 2669.51,4250.51 v1(2672,4253) ; IC1.4 2613.43,4318.93 2647.78,4318.93 2673,4293.71 v1(2673,4293) ; v1(2711,4043) 2711.05,4043.05 2711.05,4103.1 IC1.15 ; v1(2740,4043) 2741.72,4044.72 2741.72,4051.09 2742.49,4051.85 2742.49,4060.82 2750.47,4068.8 IC1.17 ; IC1.21 2829.21,4053.31 2839,4043.52 v1(2839,4041.76)
  SIG4 w15: v1(2672,4253) 2674.49,4250.51 2696.4,4250.51 2702.69,4244.22 2704.33,4244.22 2723.03,4225.53 C17.1 2725.5,4226.03 2725.5,4272.97 C18.1 2692.53,4273.47 v1(2673,4293) ; C16.1 2690.28,4086.75 2690.28,4060.1 2705.66,4044.72 2709.28,4044.72 v1(2711,4043) ; v1(2740,4043) 2740,4046.52 2728,4058.52 2728,4076.56 2742.47,4091.03 C14.1 ; v1(2839,4041.76) 2839,4043.52 2854,4058.52 2854,4070 2848.72,4075.28 2848.72,4084.75 C15.1
3V3D: C9.1 C10.1 C19.1 C20.1 FB.2 IC1.28 IC2.1 R2.1 R3.1 R4.1 R5.1 R12.2 R18.2 R21.2 R22.2 R23.2 | length 273.2
  SIG4 w15: R21.2 R23.2 2824.41,4434 2824.41,4390 R12.2@2825.41,4389 ; FB.2 2835.28,4228.16 2844.04,4228.16 C20.1 2944.01,4224.11 2944.01,4175.53 C10.1
ACT: ACT.1 IC1.27 | length 1506.6
  SIG1 w12: ACT.1 1851.21,3932 v1(1890,3932) ; IC1.27 2946.94,4201.01 2984.94,4201.01 3005.89,4180.06 3005.89,4154.57 3056.53,4103.93 3076.82,4083.63 3076.82,4083.42 3083,4077.25 v1(3083,4074)
  Power3 w12: v1(1890,3932) 1891,3931 2944.07,3931 3076.82,4063.75 3076.82,4064.58 3083,4070.75 v1(3083,4074)
Chassis: C21.1 J1.13 J1.14 | length 635
  SIG4 w25: J1.13@1390.2,4142.99 J1.14@1390.2,4778.03
CT: C8.2 J1.7 R13.1 | length 209.2
  SIG1 w5.08: J1.7 2210,4210.34 2316.98,4103.36 R13.1 C8.2@2320,4057.95
DUP: DUP.2 IC1.26 | length 1066.4
  SIG1 w12: DUP.2 2234.96,3950.62 2245.37,3950.62 2252.75,3958 v1(2256,3958) ; IC1.26 2946.94,4181.32 2979.17,4181.32 2980.86,4179.64 2987.89,4172.61 2987.89,4147.11 3047.85,4087.15 3050.53,4084.47 3050.53,4076.12 v1@3052.82,4073.82
  Power3 w12: v1(2256,3958) 2600.17,3958 2621.17,3979 2962.09,3979 3046.82,4063.73 3046.82,4064.45 3052.82,4070.45 v1(3052.82,4073.69)
EXCAP: C2.2 IC1.20 | length 82.2
  SIG1 w12: C2.2 2791.06,4029.68 2809.53,4048.15 IC1.20
EXRES: IC1.10 R1.2 | length 149.9
  SIG1 w12: R1.2 2605,4120.43 2614.75,4130.18 2633.51,4130.18 2654.19,4150.86 2654.19,4192.29 2645.47,4201.01 2613.24,4201.01 IC1.10
GND: !RST1.2 C1.1 C2.1 C3.2 C4.2 C7.1 C8.1 C9.2 C10.2 C12.2 C13.2 C14.2 C15.2 C16.2 C17.2 C18.2 C19.2 C20.2 C21.2 IC1.3 IC1.9 IC1.14 IC1.16 IC1.19 IC1.23 IC1.29 IC1.48 IC2.2 J2.5 R1.1 R18.1 Y1.2 Y1.4 | length 1481
  SIG1 w5.08: C8.1 2324.13,4012.05 2347.47,4035.38 2353.38,4035.38 v1(2357,4039) ; v1(2385,4024) 2397.28,4011.72 2422.85,4011.72 C7.1 ; v1(2689,4168) 2690.21,4166.79 2690.21,4104.36 IC1.14 ; IC2.2@2994.94,5265.26 2998,5262.2 v1(2998,5226) ; Y1.4 3084.65,4244.45 3107.47,4221.62 3118.38,4221.62 v1(3122,4218) ; v1(3131,4178) 3167.83,4178 Y1.2 ; C3.2 3171.62,4117 v1(3202,4117) ; C4.2 3227.95,4186.38 3250,4164.33 v1(3250,4160) ; C9.2 3307,4979.17 3343.83,5016 v1(3368,5016)
  SIG1 w5.5: v1(2575,4019) 2575,4019.57 2605,4049.57 R1.1
  SIG1 w12: C12.2 v1(2378,4697.89) ; IC1.9 2613.24,4220.88 2674.88,4220.88 v1(2675,4221) ; IC1.3 IC1.3 2673.95,4338.95 v1(2674,4339) ; IC1.48 2671.83,4436.76 2671.83,4377.17 v1(2673,4376) ; IC1.16 2730.88,4103.24 2730.88,4135.47 2756.11,4160.7 2763.7,4160.7 v1(2766,4163) ; IC1.19 2789.94,4103.24 2789.94,4147.69 2800,4157.75 v1(2800,4161) ; C2.1 2791.06,3980.32 2807.7,3963.67 2807.7,3957.3 v1(2810,3955) ; v1(2860,4164) 2860,4160.75 2868.58,4152.17 IC1.23 ; v1(2869,3955) 2869.8,3955.8 2891.3,3955.8 C1.1 ; v1(2883,4254) 2886.25,4254 2899.77,4240.47 IC1.29
  SIG4 w5.08: v1(2689,4168) 2723.47,4168 C17.2 ; C18.2 2727,4333.53 v1(2727,4368) ; C15.2 2899.53,4094.97 2912.73,4108.18 2939.7,4108.18 C10.2
  SIG4 w5.5: C16.2 2639.47,4058.53 v1(2656,4042)
  SIG4 w12: C21.2 v1(1570,4470) ; v1(2539,4020) 2539.53,4020 C13.2@2560,4040.47 ; v1(2885,4286) 2886.19,4287.19 C20.2 ; C10.2 2955.78,4092.71 2955.78,4081.47 2962,4075.25 v1(2962,4072)
HV+: BR1.1 BR2.1 D5.1 IC2.4
HV-: BR1.2 BR2.2 D5.2 IC2.5
INTn: IC1.36 R12.1 | length 80.4
  SIG1 w12: v1(2902,4379) 2902.64,4378.36 2946.76,4378.36 IC1.36
  SIG4 w12: R12.1@2873.59,4388 2873.59,4382.65 2877.24,4379 v1(2902,4379)
LINK: IC1.25 LINK.1 | length 999.5
  SIG1 w12: LINK.1 2253.04,3996.3 2269.7,3996.3 v1(2272,3994) ; IC1.25 2969.79,4161.73 2969.89,4161.64 2969.89,4135.11 3020.53,4084.47 3020.53,4075.97 v1(3022.82,4073.67)
  Power3 w12: v1(2272,3994) 2272,3990.75 2280,3982.75 2280,3976 2592.71,3976 2613.71,3997 2950.99,3997 3016.84,4062.85 3016.84,4064.44 3022.82,4070.43 v1(3022.82,4073.67)
MISO: IC1.34 J2.2 | length 218.5
  SIG1 w12: IC1.34 2998.9,4338.9 3060,4400 J2.2
MOSI: IC1.35 J2.1 | length 168.8
  SIG1 w12: IC1.35 2946.94,4358.68 2979.17,4358.68 2987.89,4367.39 2987.89,4439.28 2960,4467.17 J2.1
NetACT_2: ACT.2 R5.2
NetC1_2: C1.2 IC1.22 | length 114.8
  SIG1 w12: IC1.22 2848.99,4103.06 2848.99,4070.83 2885.62,4034.2 2900.96,4034.2 2904,4034.2 C1.2@2916.3,4034.2
NetC4_1: C4.1 R7.1 Y1.3 | length 3.9
  SIG1 w5.5: R7.1@3155.95,4301.5 R7.1@3155.95,4305.44
NetC7_2: C7.2 R16.1 R17.1 | length 113.7
  SIG1 w5.08: R16.1 R17.1 2495.43,4066.02 C7.2
NetDUP_1: DUP.1 R4.2
NetLINK_2: LINK.2 R3.2
NetR2_2: R2.2 SPEED.2
PMODE: IC1.43 IC1.44 IC1.45 R21.1 | length 149.5
  SIG1 w5.08: IC1.45 IC1.44 ; v1(2751,4486) 2750.74,4485.74 2750.74,4437.11 IC1.44 ; IC1.43 IC1.44
  SIG4 w5.08: R21.1 2727.41,4462.41 v1(2751,4486)
RSTN: !RST1.4 IC1.37 R23.1 | length 1045.1
  SIG1 w5.08: IC1.37 2888.63,4437.22 2888.63,4483.63 v1(2889,4484) 2892.62,4487.62 2902.42,4487.62 3060.61,4645.81 3060.61,4842.57 3329.47,5111.42 !RST1.4
  SIG4 w5.08: R23.1 2874.59,4467.07 2889,4481.48 v1(2889,4484)
RX1_N: C5.1 J1.8 | length 223.9
  SIG1 w5.08: J1.8@2215,4300.08 2215,4289.23 2232.99,4271.24 2236.16,4271.24 2278.36,4229.04 2371.77,4229.04 2374.75,4232.02 2374.75,4243.21 C5.1@2386.04,4254.5
RX1_P: C6.1 J1.1 | length 328.4
  SIG1 w5.08: J1.1@2115,4260.32 2140.92,4286.24 2169.5,4286.24 2198.58,4257.16 2230.33,4257.16 2272.53,4214.96 2371.77,4214.96 2374.75,4211.98 2374.75,4200.79 C6.1@2386.04,4189.5
RX_N: IC1.5 R10.2 | length 103.3
  SIG1 w5.5: R10.2 2541.5,4258.86 2554.49,4271.86 2554.92,4271.86 2558.14,4275.08 2558.14,4285.22 2569.86,4296.94 2610.56,4296.94 IC1.5
RX_P: IC1.6 R11.2 | length 150.5
  SIG1 w5.5: R11.2@2545.64,4182.83 2558.64,4195.83 2558.64,4214.41 2572.64,4228.42 2572.64,4279.21 2575.86,4282.44 2610.56,4282.44 IC1.6
RX_RJ_N: C5.2 R10.1 R16.2 | length 218.2
  SIG1 w5.08: C5.2 2437.56,4246.06 2413.67,4222.17 2413.67,4151.93 2437.05,4128.54 R16.2 ; C5.2@2441.16,4254.5 2452.45,4243.21 2452.45,4232.02 2455.42,4229.04 2466.07,4229.04 2469.05,4232.02 2469.05,4241.29 R10.1@2482.26,4254.5
RX_RJ_P: C6.2 R11.1 R17.2 | length 138.4
  SIG1 w5.08: C6.2@2441.16,4189.5 2452.44,4200.79 2452.44,4211.98 2455.42,4214.96 2466.07,4214.96 2469.44,4211.59 2469.44,4196.04 2482.65,4182.83 2482.65,4135.89 R17.2
SCLK: IC1.33 J2.3 | length 291.5
  SIG1 w12: IC1.33 3019.21,4319.21 3150.62,4450.62 3150.62,4470.62 J2.3
SCS: IC1.32 J2.4 R22.1 | length 528.2
  SIG1 w12: v1(2884,4326) 2910.38,4299.62 2946.76,4299.62 IC1.32 2946.94,4299.62 2973.53,4299.62 2975.12,4301.21 3041.21,4301.21 3177.49,4437.49 3177.61,4437.49 3220,4479.88 3259.88,4479.88 J2.4
  SIG4 w12: v1(2884,4326) 2887.25,4326 2895.66,4334.41 R22.1
SPEED: IC1.24 SPEED.1 | length 1376.7
  SIG1 w12: SPEED.1 1862.96,4037.62 1875.37,4037.62 1884.75,4047 v1(1888,4047) ; IC1.24 2888.27,4125.91 2888.36,4126 2950.54,4126 2993.33,4083.22 2993.33,4073.28 v1(2992.84,4072.79)
  Power3 w12: v1(1888,4047) 1889,4048 2251.94,4048 2296,4003.94 2296,4001.03 2303.03,3994 2585.26,3994 2606.26,4015 2943,4015 2986,4058 2986,4062.71 2992.84,4069.54 v1(2992.84,4072.79)
TX_N: IC1.1 R8.2 | length 87.9
  SIG1 w5.08: R8.2@2543.87,4394 2543.87,4386.27 2559.55,4370.59 2567.24,4370.59 2569.01,4372.36 2574.92,4378.27 2610.01,4378.27 IC1.1@2613.11,4375.17
TX_P: IC1.2 R9.2 | length 86
  SIG1 w5.08: R9.2@2545,4331.98 2545,4340.83 2559.55,4355.39 2559.55,4356.51 2573.07,4356.51 2574.85,4358.28 2610.3,4358.28 IC1.2@2613.11,4355.48
TX_RJ_N: J1.9 R8.1 R14.1 | length 308.7
  SIG1 w5.08: J1.9@2215,4380 2215,4369.15 2232.99,4351.16 2237.19,4351.16 2256.62,4370.59 2466.33,4370.59 2482,4386.27 R8.1@2482,4395.13
TX_RJ_P: J1.2 R9.1 R15.1 | length 391.7
  SIG1 w5.08: J1.2@2115,4340.24 2224,4340.24 2227.15,4337.08 2243.03,4337.08 2262.45,4356.51 2466.33,4356.51 2482.01,4340.83 R9.1@2482.01,4331.98
VA1: BR2.4 J1.5 | length 377.5
  SIG1 w15: BR2.4 2008.05,4681.64 J1.5
VA2: BR2.3 J1.10 | length 682.2
  SIG1 w15: BR2.3 1997.22,5015 1953.21,4970.99 1953.21,4878.9 1954,4878.11 1954,4676.34 2092.62,4537.72 2208.19,4537.72 J1.10
VB1: BR1.4 J1.6 | length 509.4
  SIG1 w15: BR1.4 2017.87,5120 2110,5027.87 J1.6
VB2: BR1.3 J1.11 | length 691
  SIG1 w15: BR1.3 2017.87,5220 2061.89,5175.99 2061.89,5105.69 2131,5036.57 2131,4698.45 J1.11
XI: C3.1 IC1.30 R6.1 Y1.1
XO: IC1.31 R6.2 R7.2
pads on no net: !RST1.1 !RST1.3 IC1.7 IC1.12 IC1.13 IC1.18 IC1.38 IC1.39 IC1.40 IC1.41 IC1.42 IC1.46 IC1.47 IC2.3 J1.15 J1.16

## Polygon pours and split planes (outlines as drawn)
GND on GND2 "NONET_L02_P000" (solid, shelved, pour order 0): 1102.88,3810.25 cw(c1100.56,3909.94) 1000.88,3907.62 1000.88,5362.88 cw(c1107.25,5362.88) 1107.25,5469.25 4236.41,5472.34 cw(c4243.66,5400.62) 4315.38,5407.88 4315.38,3917.88 cw(c4207.75,3917.88) 4207.75,3810.25

## Other copper
Multi-Layer:
  pour cut-out: 1084,4836 1084,4086 2274,4086 2284,4096 2284,4836

## Silkscreen, mask and mechanical layers (free items; w line width, h text height)
Top Overlay:
  text "RST" at 3247,5347 h40
  text "Pover-over-Ethernet  / Dev Board V1 /  / Daniel Ng 2026" at 1113,5072 h50
  text "DNP" at 3111,4731 h40 r90
  text "MOSI" at 2897,4545 h30
  text "MISO" at 3014,4545 h30
  text "CLK" at 3135,4545 h30
  text "CS" at 3238,4545 h30
  text "GND" at 3317,4545 h30
Mechanical 1:
  lines w10: 1000,4020 ccw(c1136.66,4016.67) 1140,3880 3420,3880 ccw(c3423.33,4016.66) 3560,4019.99 3560,4620 3560,5240 3560,5340 ccw(c3423.34,5343.33) 3420.01,5480 2740,5480 1860,5480 1140,5480 ccw(c1136.67,5343.33) 1000,5340 1000,4020

## Text inside footprints (layer, text, board x,y; h text height)
C12: Top Overlay "+" at 2297.43,4495.57 h48 r270
C19: Top Overlay "+" at 2661.43,4428.43 h48